# EAGLE board untitled (EAGLE 9.6.2)
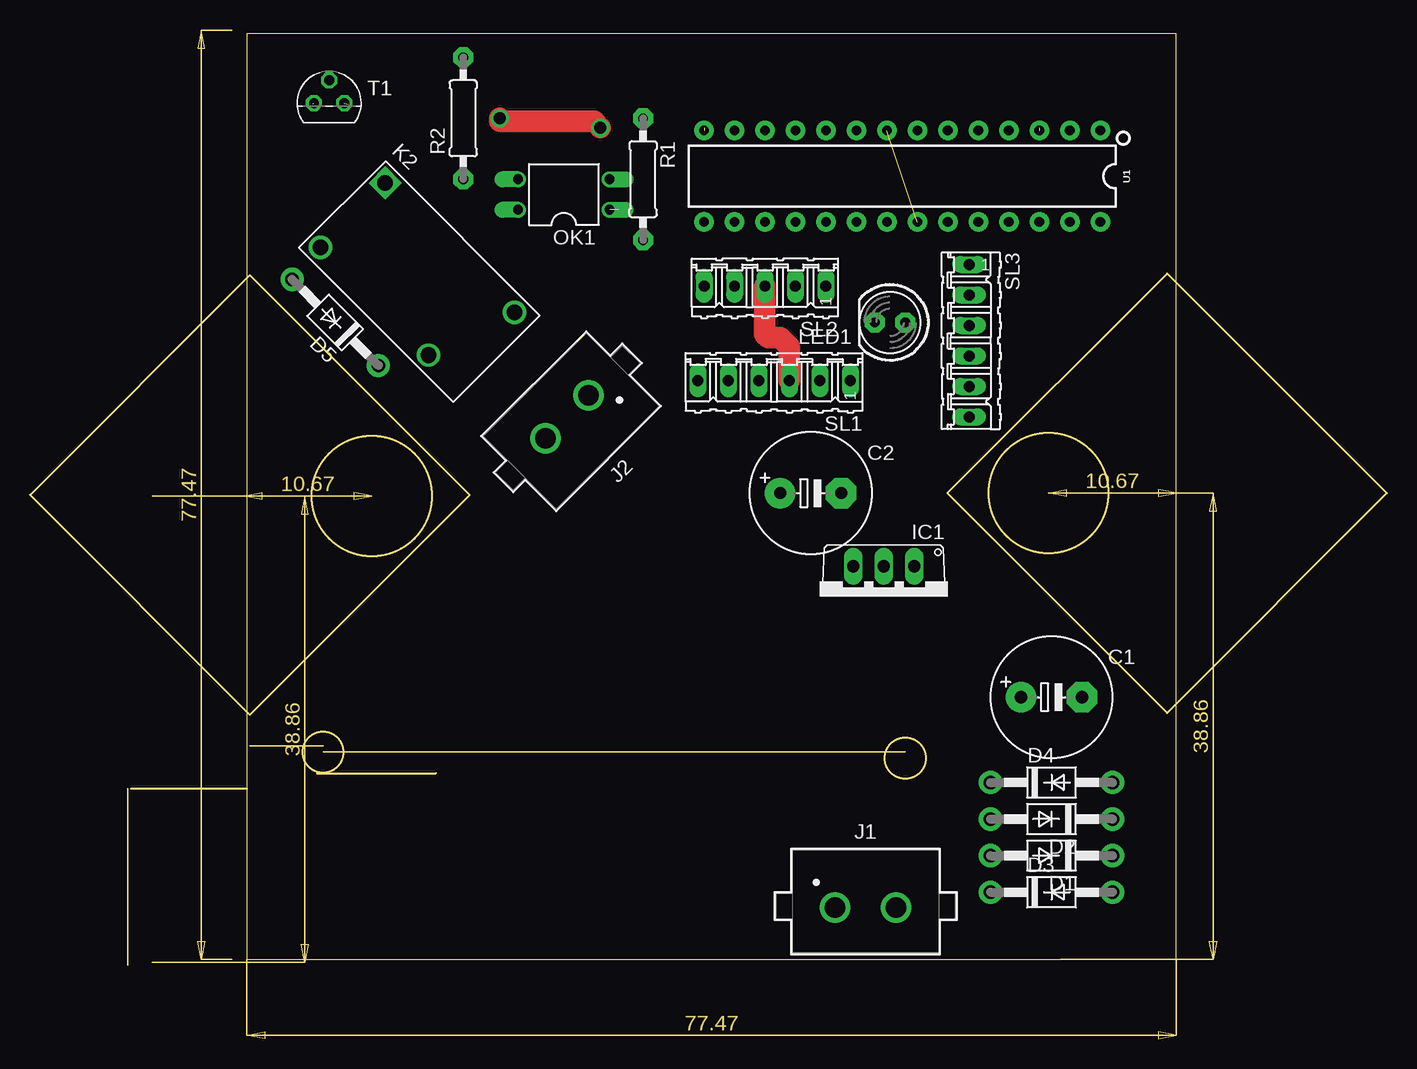
[diagram p0: board, top side]
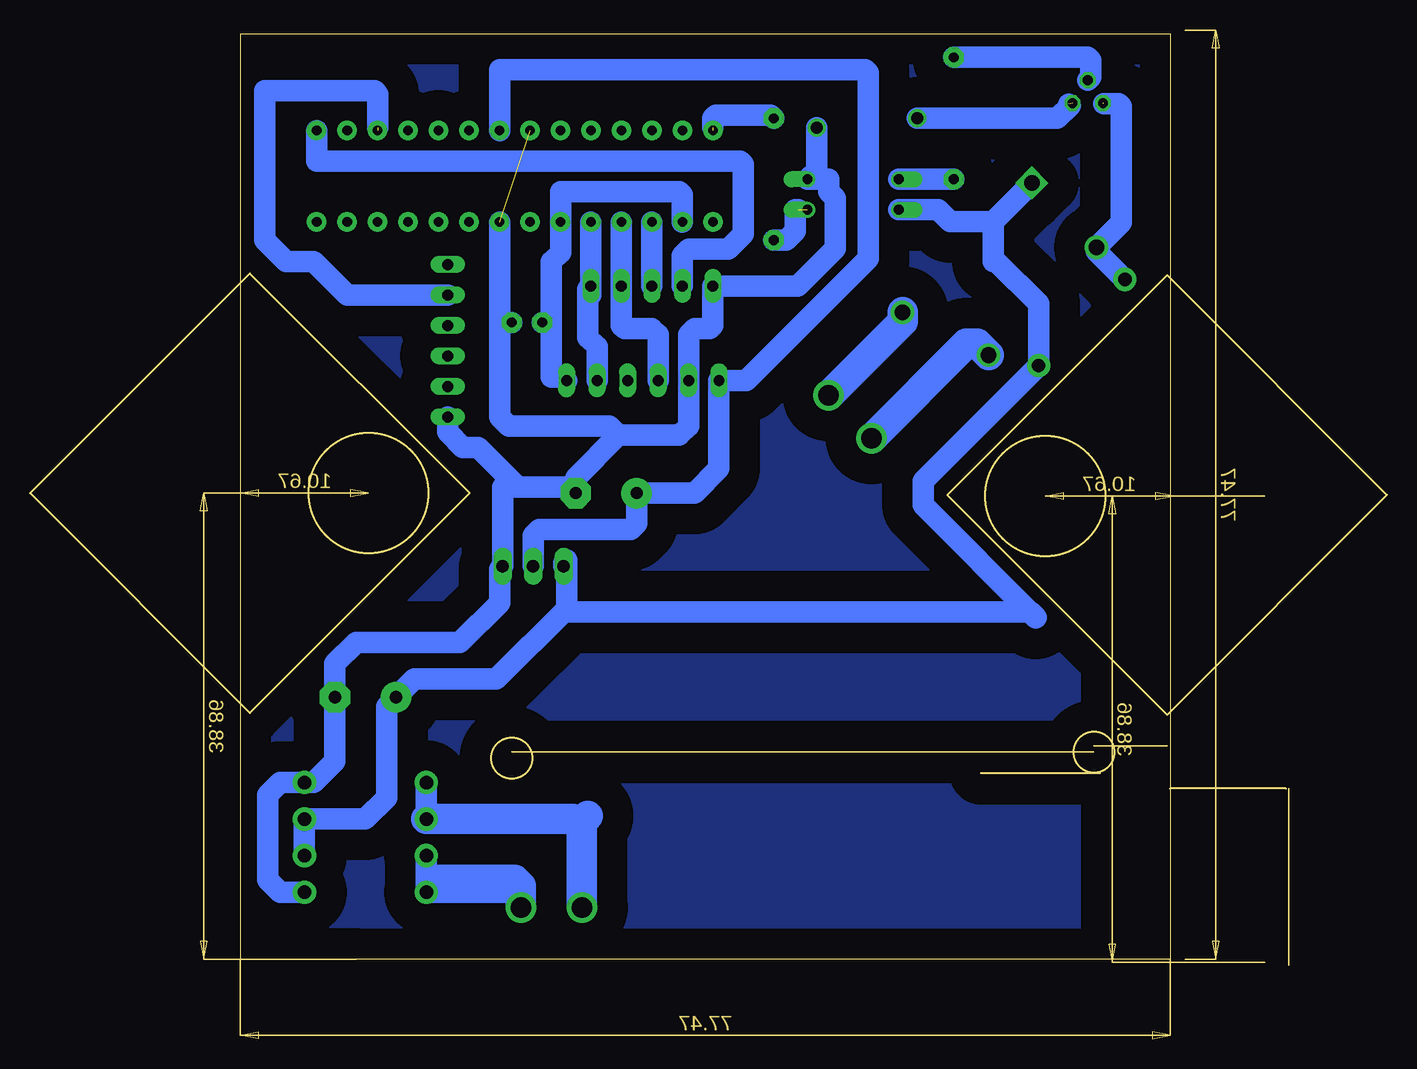
[diagram p1: board, bottom side, seen from below]

Size 113.08 x 77.14 mm. Coordinates in mm from the lower left corner, seen from the top.
Outline: 18.07,14.22 18.07,77.14 95.52,77.14 95.52,0 18.07,0 18.07,14.22
Outline: 8.42,14.22 18.07,14.22
Outline: 23.91,15.49 33.82,15.49
Outline: 18.32,20.39 36.64,38.7 18.32,57.02 0,38.7 18.32,20.39
Outline: 94.76,20.53 113.08,38.84 94.76,57.16 76.44,38.84 94.76,20.53
Outline: circle at 28.48,38.61 radius 5
Outline: circle at 84.87,38.86 radius 5
Outline: circle at 24.42,17.27 radius 1.7
Outline: circle at 72.93,16.76 radius 1.7
Copper layers (1*16): Top 0.035mm / dielectric 1.5mm / Bottom 0.035mm
Design rules "default *": minimum track width 6mil, minimum drill 0.35mm, track to track 30mil, track to pad 30mil, pad to pad 6mil, via to via 6mil, smd to smd 6mil, copper to edge 40mil, drill to drill 6mil, minimum pad ring 10mil, minimum via ring 8mil, stop-mask expansion 4mil, vias tented up to drill 0mil, thermal gap 10mil

## Footprints (pad centres in the part's own frame; a part is rotated, then mirrored left to right if it is on the bottom)
E5-10,5 = drill 1.016 pad 2.54: + -2.54,0 | drill 1.016 pad 2.54 octagon: - 2.54,0
DO41-10 = drill 1.118 pad 1.93: A 5.08,0; C -5.08,0
TO220V = drill 1.016 long: 1 -2.54,-2.54; 2 0,-2.54; 3 2.54,-2.54
691305530002 = drill 1.7: 1 -2.54,0; 2 2.54,0
OJE-SH-112HM,000 = drill 1.3 square: A1 -7.62,3.8 | drill 1.3: A2 -7.62,-3.8; NC 7.62,3.8; NO 5.08,-3.8
LED5MM = drill 0.813 pad 1.676 octagon: A -1.27,0; K 1.27,0
DIL04 = drill 0.813 offset: 1 -1.27,-3.81; 2 1.27,-3.81; 3 1.27,3.81; 4 -1.27,3.81
0207/10 = drill 0.813 pad 1.676 octagon: 1 -5.08,0; 2 5.08,0
06P = drill 0.914 long: 1 -6.35,0; 2 -3.81,0; 3 -1.27,0; 4 1.27,0; 5 3.81,0; 6 6.35,0
05P = drill 0.914 long: 1 -5.08,0; 2 -2.54,0; 3 0,0; 4 2.54,0; 5 5.08,0
TO92 = drill 0.813 octagon: 1 1.27,0; 2 0,1.905; 3 -1.27,0
DIP28 = drill 0.813 pad 1.626: 1 -16.51,-3.81; 2 -13.97,-3.81; 3 -11.43,-3.81; 4 -8.89,-3.81; 5 -6.35,-3.81; 6 -3.81,-3.81; 7 -1.27,-3.81; 8 1.27,-3.81; 9 3.81,-3.81; 10 6.35,-3.81; 11 8.89,-3.81; 12 11.43,-3.81; 13 13.97,-3.81; 14 16.51,-3.81; 15 16.51,3.81; 16 13.97,3.81; 17 11.43,3.81; 18 8.89,3.81; 19 6.35,3.81; 20 3.81,3.81; 21 1.27,3.81; 22 -1.27,3.81; 23 -3.81,3.81; 24 -6.35,3.81; 25 -8.89,3.81; 26 -11.43,3.81; 27 -13.97,3.81; 28 -16.51,3.81

## Placement (x,y rotation side)
C1  [E5-10,5]  85.12,21.84 0 top
C2  [E5-10,5]  65.06,38.86 0 top
D1  1N4004  [DO41-10]  85.12,8.64 180 top
D2  1N4004  [DO41-10]  85.12,11.68 180 top
D3  1N4004  [DO41-10]  85.12,5.59 0 top
D4  1N4004  [DO41-10]  85.12,14.73 0 top
D5  1N4004  [DO41-10]  25.43,53.09 135 top
IC1  LM1117T(V)-ADJ  [TO220V]  71.16,30.23 180 top
J1  [691305530002]  69.63,4.32 0 top
J2  [691305530002]  44.74,45.21 225 top
K2  OJE-SH-112HM,000  [OJE-SH-112HM,000]  32.29,56.64 315 top
LED1  [LED5MM]  71.66,53.09 180 top
OK1  PC817  [DIL04]  44.48,63.75 90 top
R1  [0207/10]  51.09,65.02 270 top
R2  [0207/10]  36.1,70.1 90 top
SL1  [06P]  62.01,48.26 180 top
SL2  [05P]  61.25,56.13 180 top
SL3  [06P]  78.27,51.56 270 top
T1  BC547  [TO92]  24.93,71.37 0 top
U1  328P  [DIP28]  72.68,65.28 180 top

## Library data of the parts
C1 C2 = rcl; SPICEPREFIX: C
D1-D5 LED1 R1 R2 = adafruit
IC1 = lm1117_10; MF: Texas Instruments; MPN: LM1777T-ADJ; OC_FARNELL: 9485805; OC_NEWARK: 13B5345
J1 J2 = Wurth_Connectors_WR-TBL Pluggable Connector; DATASHEET-URL: https://www.we-online.com/catalog/datasheet/691305530002.pdf; IR-UL: 16A; MOUNT: THT; PART-NUMBER: 691305530002; PINS: 2; PITCH: 5.08mm; TYPE: Vertical; WORKING-VOLTAGE-UL: 300V (AC)
K2 = Relay; CREATED_BY: PCBLayout.com; DIGIKEY_PART_NUMBER: PB876-ND; MANUFACTURER: TE Connectivity Potter & Brumfield Relays; MANUFACTURER_PART_NUMBER: OJE-SH-112HM,000
OK1 = optocoupler; MPN: PC817X4J000F; OC_FARNELL: 9707727; OC_NEWARK: 97K7059
SL1-SL3 = con-amp-quick; OC_FARNELL: unknown; OC_NEWARK: unknown
T1 = transistor
U1 = SparkFun-IC-Microcontroller; PROD_ID: IC-09136

## Nets
GND: C1.- C2.- D3.A D4.A IC1.1 LED1.A OK1.2 SL1.5 SL2.5 SL3.6 T1.1 U1.8 U1.22
HVCC: C1.+ D1.C D2.C D5.C IC1.3 K2.A1 OK1.4
N$1: D1.A D3.C J1.2
N$2: SL1.2 SL2.1 U1.19
N$3: LED1.K SL1.1 U1.16 U1.20
N$4: D5.A K2.A2 T1.3
N$5: D2.A D4.C J1.1
N$6: SL1.4 SL2.2 U1.18
N$7: SL1.3 SL2.3 U1.17
N$8: SL2.4 U1.1
N$9: R1.1 U1.14
N$10: OK1.3 R2.1
N$11: R2.2 T1.2
N$12: J2.1 K2.NC
N$13: J2.2 K2.NO
OCT: OK1.1 R1.2
TX: SL3.2 U1.3
VCC: C2.+ IC1.2 SL1.6 U1.7

## Tracks (layer width: path | path; a pad name or v marks a point on that pad's centre or on a via)
GND  (via drill 1)  (2 unrouted)
  Top 1.778: v47.53,69.34 47.02,69.85 39.15,69.85 v39.15,70.1
  Bottom 1.778: D3.A 92.24,5.59 93.25,6.6 93.25,13.72 92.24,14.73 D4.A 89.44,14.73 87.67,16.51 C1.- 87.67,24.64 85.89,26.42 77.25,26.42 73.95,29.72 73.95,32.51 IC1.1 73.69,39.37 72.42,39.37 | 72.42,39.37 68.11,39.37 C2.- 67.6,40.13 64.04,43.69 | 64.04,43.69 58.96,43.69 58.2,44.45 SL1.5 58.2,52.07 57.69,52.58 56.42,52.58 56.17,52.83 SL2.5 49.09,56.13 45.98,59.24 45.98,63.44 46.52,63.98 46.52,65.02 OK1.2 47.53,65.79 v47.53,69.34 | 64.04,43.69 64.8,44.45 73.19,44.45 73.95,45.21 73.95,53.09 | 73.95,53.09 U1.22 | v39.15,70.1 27.47,70.1 26.41,71.17 26.53,71.29 | 72.42,39.37 75.73,42.67 77,42.67 78.27,43.94 SL3.6 | LED1.A 73.95,53.09
HVCC
  Bottom 1.778: D1.C D2.C 85.12,11.68 83.35,13.46 83.35,21.08 C1.+ 81.06,23.37 74.2,23.37 68.36,29.21 | 68.36,29.21 68.36,33.27 68.61,33.02 IC1.3 | K2.A1 32.8,61.51 | 32.8,61.51 32.8,58.17 32.55,58.17 29.03,54.65 D5.C 38.64,39.88 38.64,37.85 29.24,28.45 29.21,28.48 29.69,28.96 68.11,28.96 68.36,29.21 | 32.8,61.51 36.4,61.51 37.37,62.48 OK1.4
N$1
  Bottom 1.778: D1.A D3.C 72.17,5.59 71.92,5.33 71.92,4.57 J1.2
  Bottom 2.54: J1.2 72.17,6.1 72.68,6.6 79.28,6.6
N$2
  Bottom 1.778: U1.19 SL2.1 | 66.33,55.37 SL2.1 | SL1.2 65.82,51.05 66.58,51.82 66.58,55.88 SL2.1
N$3
  Bottom 1.778: SL1.1 68.61,48.51 69.63,48.51 69.63,53.09 | 69.63,53.09 69.63,58.17 68.87,58.93 U1.20 68.87,64.01 58.96,64.01 58.71,63.75 U1.16 | LED1.K 69.63,53.09
N$4  (1 unrouted)
  Bottom 1.778: D5.A 24.22,59.05 K2.A2 22.13,61.43 22.13,71.12 22.34,71.33 23.61,71.33
N$5
  Bottom 1.778: 67.09,10.92 67.34,11.18 67.85,11.68 | D4.C D2.A
  Bottom 2.54: J1.1 67.09,10.92 | 67.85,11.68 D2.A | 67.34,11.18 66.58,11.94
N$6
  Bottom 1.778: U1.18 SL2.2 63.79,52.83 63.53,52.58 61.25,52.58 60.74,52.07 SL1.4
N$7
  Top 1.778: SL2.3 61.25,52.07 61.5,51.82 62.52,51.82 63.28,51.05 SL1.3
  Bottom 1.778: U1.17 SL2.3
N$8
  Bottom 1.778: SL2.4 58.71,58.67 58.2,59.18 54.9,59.18 53.63,60.45 53.63,66.29 53.88,66.55 89.19,66.55 U1.1
N$9  (1 unrouted)
  Bottom 1.778: R1.1 51.34,70.36 55.91,70.36 56.17,70.1 56.17,69.34
N$10
  Bottom 1.778: R2.1 OK1.3
N$11
  Bottom 1.778: T1.2 24.67,73.53 24.67,74.93 24.93,75.18 R2.2
N$12
  Bottom 2.54: J2.1 40.37,53.17 K2.NC
N$13
  Bottom 2.54: K2.NO 34.14,51.31 35.05,51.31 J2.2
N$14
  pour Bottom (isolate 2.54): 17.81,77.22 95.54,77.22 95.54,57.91 76.49,38.86 95.28,20.07 95.28,19.56 95.28,0 18.07,0 18.07,20.07 18.32,20.32 36.61,38.61 36.61,38.86 18.07,57.4 18.07,76.96
OCT  (1 unrouted)
  Bottom 1.778: R1.2 50.07,59.94 49.31,60.71 49.31,62.48 49.06,62.48
TX  (1 unrouted)
  Bottom 1.778: SL3.2 86.65,55.37 89.44,58.17 91.73,58.17 93.51,59.94 93.51,72.39 84.36,72.39 84.11,72.14 84.11,69.34
VCC
  Bottom 1.778: IC1.2 71.16,35.31 70.65,35.81 63.03,35.81 62.52,36.32 C2.+ 57.69,38.86 55.66,40.89 SL1.6 53.38,48.26 43.22,58.42 43.22,73.91 43.47,74.17 73.95,74.17 U1.7